# EAGLE board Esquema 03 guilherme (EAGLE 9.6.2)
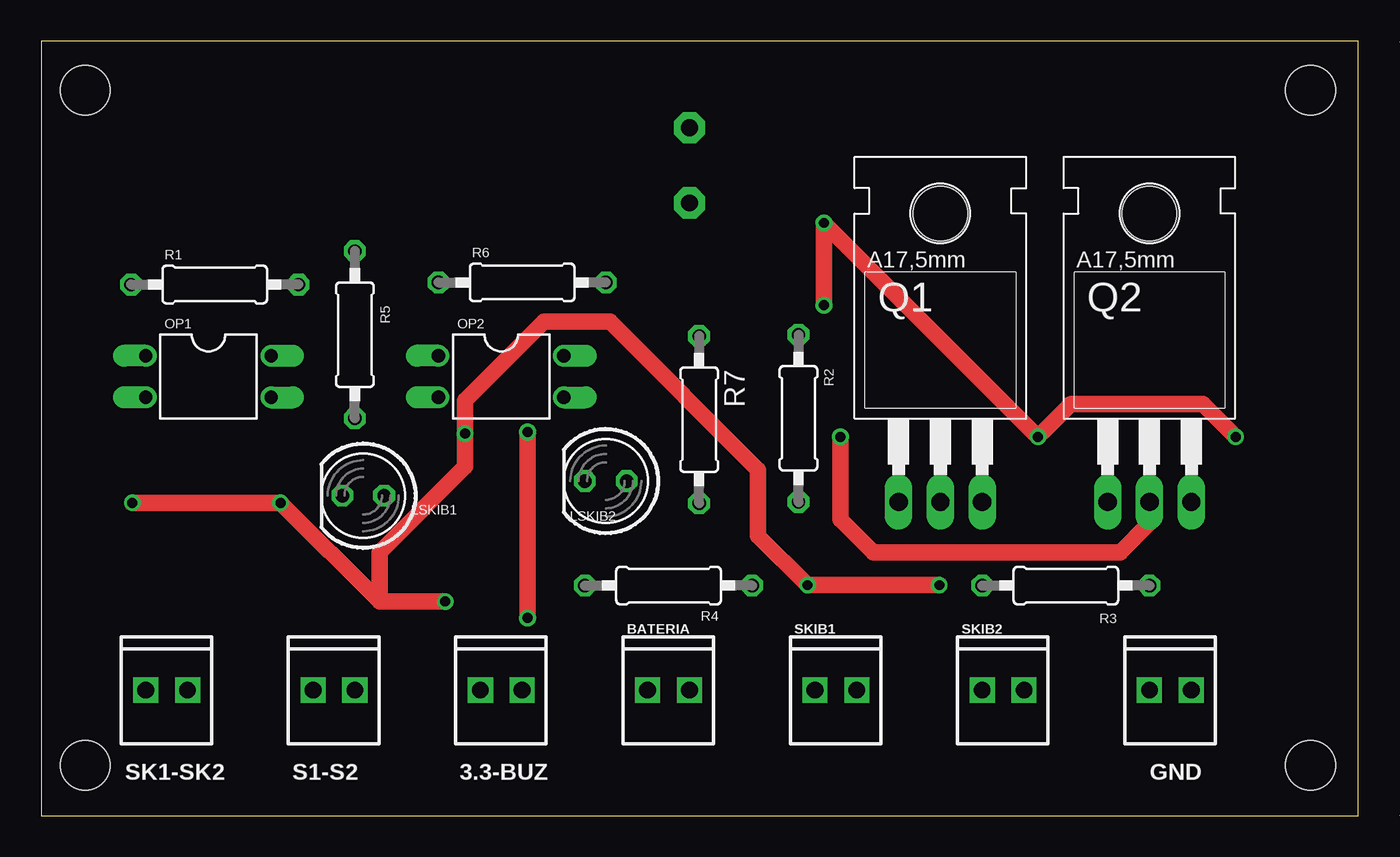
[diagram p0: board, top side]
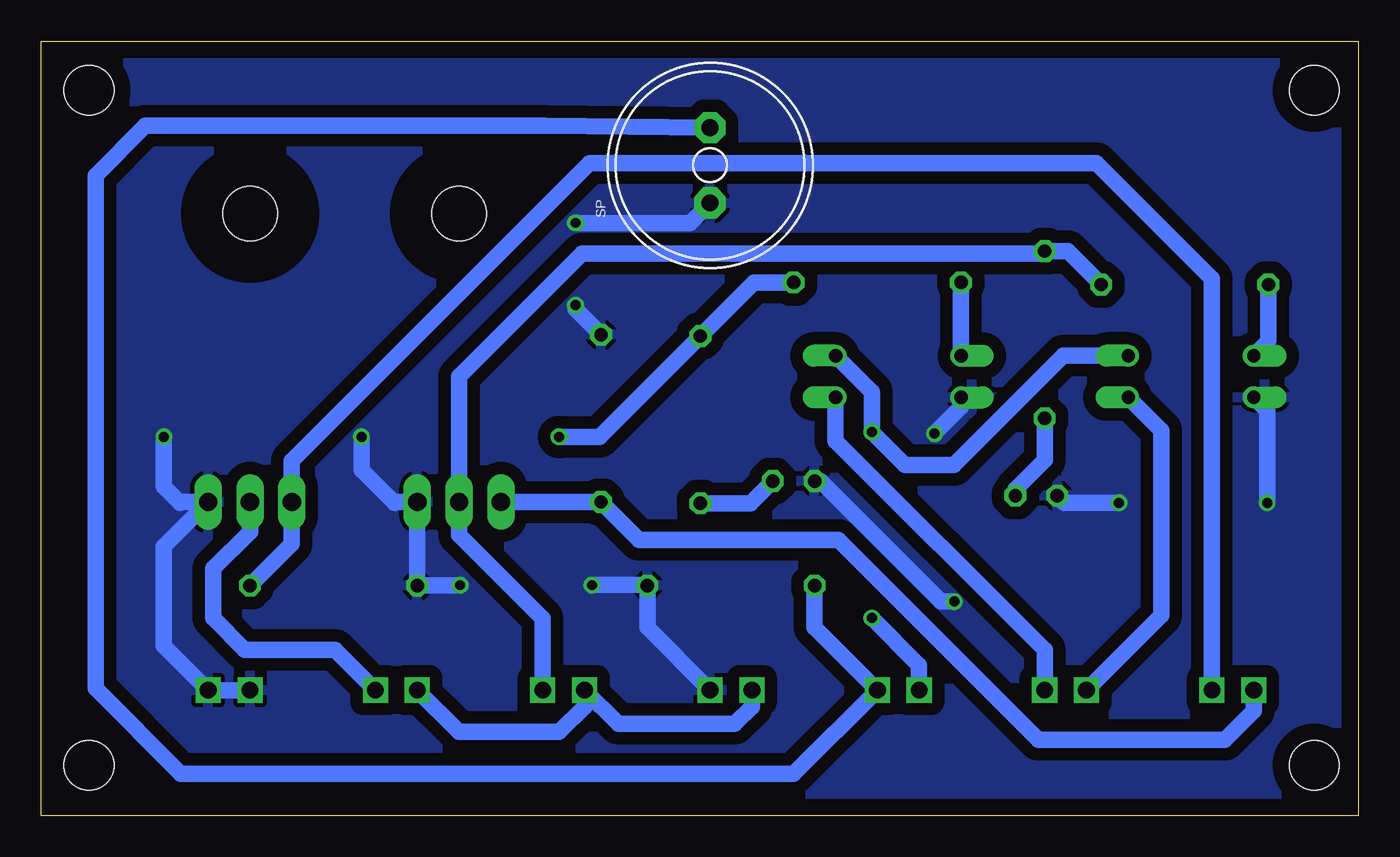
[diagram p1: board, bottom side, seen from below]

Size 79.99 x 47.04 mm. Coordinates in mm from the lower left corner, seen from the top.
Outline: 0,0 79.99,0 79.99,47.04 0,47.04 0,0
Copper layers (1*16): Top 0.035mm / dielectric 1.5mm / Bottom 0.035mm
Design rules "default *": minimum track width 1mm, minimum drill 0.35mm, track to track 30mil, track to pad 0.5mm, pad to pad 6mil, via to via 6mil, smd to smd 6mil, copper to edge 40mil, drill to drill 6mil, minimum pad ring 10mil, minimum via ring 8mil, stop-mask expansion 4mil, vias tented up to drill 1mm, thermal gap 10mil
Holes 3 mm at 2.67,44.07 77.09,44.07 2.67,3.05 77.09,3.05

## Footprints (pad centres in the part's own frame; a part is rotated, then mirrored left to right if it is on the bottom)
1X02_2.54_SCREWTERM = drill 1.016 square: P1 2.54,0; P2 0,0
LED5MM = drill 0.813 octagon: A -1.27,0; K 1.27,0
DIL04 = drill 0.813 offset: 1 -1.27,-3.81; 2 1.27,-3.81; 3 1.27,3.81; 4 -1.27,3.81
TO220 = drill 1.118 long: 1 -2.54,-6.35; 2 0,-6.35; 3 2.54,-6.35 | hole 3.302: 0,11.176
0207/10 = drill 0.813 octagon: 1 -5.08,0; 2 5.08,0
AL11P = drill 1.016 pad 1.905 octagon: + 2.286,0; - -2.286,0

## Placement (x,y rotation side)
3.3-BUZ  [1X02_2.54_SCREWTERM]  26.67,7.62 0 top
BATERIA  [1X02_2.54_SCREWTERM]  36.83,7.62 0 top
GND  [1X02_2.54_SCREWTERM]  67.31,7.62 0 top
LSKIB1  5mm  [LED5MM]  19.56,19.43 180 top
LSKIB2  5mm  [LED5MM]  34.29,20.32 180 top
OP1  PC817  [DIL04]  10.16,26.67 270 top
OP2  PC817  [DIL04]  27.94,26.67 270 top
Q1  IRF540  [TO220]  54.61,25.4 0 top
Q2  IRF540  [TO220]  67.31,25.4 0 top
R1  1k  [0207/10]  10.54,32.26 0 top
R2  1k  [0207/10]  45.99,24.13 270 top
R3  1k  [0207/10]  62.23,13.97 0 top
R4  1k  [0207/10]  38.1,13.97 180 top
R5  1k  [0207/10]  19.05,29.21 270 top
R6  1k  [0207/10]  29.21,32.38 0 top
R7  1k  [0207/10]  39.96,24.05 270 top
S1-S2  [1X02_2.54_SCREWTERM]  16.51,7.62 0 top
SK1-SK2  [1X02_2.54_SCREWTERM]  6.35,7.62 0 top
SKIB1  [1X02_2.54_SCREWTERM]  46.99,7.62 0 top
SKIB2  [1X02_2.54_SCREWTERM]  57.15,7.62 0 top
SP  AL11P  [AL11P]  39.37,39.5 90 bottom

## Library data of the parts
3.3-BUZ BATERIA GND S1-S2 SK1-SK2 SKIB1 SKIB2 = SparkFun-Connectors
LSKIB1 LSKIB2 = led
OP1 OP2 = optocoupler; MPN: PC817X4J000F; OC_FARNELL: 9707727; OC_NEWARK: 97K7059
Q1 Q2 = transistor-fet
R1-R7 = rcl; SPICEPREFIX: R
SP = buzzer; OC_FARNELL: unknown; OC_NEWARK: unknown

## Nets
3.3V: 3.3-BUZ.P2 OP1.4 OP2.4
BUZZER: 3.3-BUZ.P1 R4.2 SP.+
GND: BATERIA.P1 GND.P1 GND.P2 LSKIB1.K LSKIB2.K OP1.2 OP2.2 Q1.3 Q2.3 R2.1 R3.1 R4.1 SP.-
N$1: LSKIB2.A R7.2
N$3: LSKIB1.A R5.2
N$4: OP1.1 R1.1
N$5: OP2.1 R6.1
SINAL_SKIB1: OP1.3 S1-S2.P2
SINAL_SKIB2: OP2.3 S1-S2.P1
SKIB1: Q1.1 R2.2 SK1-SK2.P2
SKIB1_CONECTOR: Q1.2 R1.2 R5.1 SKIB1.P1
SKIB2: Q2.1 R3.2 SK1-SK2.P1
SKIB2_CONECTOR: Q2.2 R6.2 R7.1 SKIB2.P1
VCC: BATERIA.P2 SKIB1.P2 SKIB2.P2

## Tracks (layer width: path | path; a pad name or v marks a point on that pad's centre or on a via)
3.3V  (via drill 0.6)
  Top 1: v29.54,23.3 v29.54,12
  Bottom 1: OP1.4 17.92,27.94 24.56,21.3 27.54,21.3 v29.54,23.3 v29.55,23.31 29.55,25.74 OP2.4 | 3.3-BUZ.P2 26.67,9.13 v29.54,12
BUZZER
  Bottom 1: R4.2 33.02,11.43 3.3-BUZ.P1 34.29,2.54 71.52,2.54 76.69,7.71 76.69,38.88 73.66,41.91 49.4,41.91 SP.+
GND  (via drill 0.6)
  Top 1: v54.54,14 v46.54,14 43.54,17 43.54,21 34.54,30 30.54,30 25.74,25.2 v25.74,23.2 25.74,21.2 20.54,16 20.54,13 | v72.54,23 70.54,25 62.54,25 v60.54,23 v47.54,36 v47.54,31 | v5.54,19 v14.54,19 20.54,13 | v24.54,13 20.54,13
  Bottom 1: SP.- 40.58,36 v47.54,36 | v60.54,23 60.54,21 58.54,19 58.49,19.05 Q1.3 R3.1 54.57,13.97 v54.54,14 | BATERIA.P1 43.18,11.43 R4.1 43.21,14 v46.54,14 | v72.54,23 72.54,20 71.54,19 71.49,19.05 Q2.3 72.54,16.36 72.54,10.31 GND.P1 GND.P2 | R2.1 47.54,30.76 v47.54,31 | LSKIB1.K 17.86,19 v14.54,19 | OP1.2 5.54,24.59 v5.54,19 | v25.74,23.2 24.13,24.81 OP2.2 | LSKIB2.K 32.67,20.32 25.35,13 v24.54,13
  pour Bottom: 0.38,46.61 0.38,0.38 79.63,0.38 79.63,46.61
N$1
  Bottom 1: R7.2 36.91,18.97 LSKIB2.A
N$3
  Bottom 1: LSKIB1.A 20.83,19.81 19.05,21.59 R5.2
N$4
  Bottom 1: OP1.1 5.46,28.83 R1.1
N$5
  Bottom 1: R6.1 OP2.1
SINAL_SKIB1
  Bottom 1: S1-S2.P2 11.97,12.16 11.97,23.4 OP1.3
SINAL_SKIB2
  Bottom 1: OP2.3 31.75,22.76 19.05,10.06 S1-S2.P1
SKIB1
  Bottom 1: SK1-SK2.P2 6.35,6.35 8.11,4.59 19.43,4.59 31.57,16.73 43.67,16.73 R2.2
  Bottom 1.016: Q1.1 R2.2
SKIB1_CONECTOR
  Bottom 1: R1.2 17.65,34.29 R5.1 19.19,34.15 47.13,34.15 54.61,26.67 Q1.2 54.61,17.05 49.53,11.97 SKIB1.P1
SKIB2
  Bottom 1: R3.2 64.77,16.51 Q2.1 64.77,21.54 46.69,39.62 15.91,39.62 8.89,32.61 SK1-SK2.P1
SKIB2_CONECTOR  (via drill 0.6)
  Top 1: Q2.2 67.31,17.77 65.54,16 50.54,16 48.54,18 v48.54,23
  Bottom 1: R6.2 36.7,32.38 R7.1 46.09,23 v48.54,23 | Q2.2 67.31,17.23 69.54,15 69.54,12 67.62,10.08 62.15,10.08 SKIB2.P1
VCC
  Bottom 1: BATERIA.P2 36.83,6.62 37.88,5.57 44.94,5.57 SKIB1.P2 46.99,6.62 48.53,5.08 54.61,5.08 SKIB2.P2